# EAGLE board atmega328_socket_tqfp32 (EAGLE 5.11)
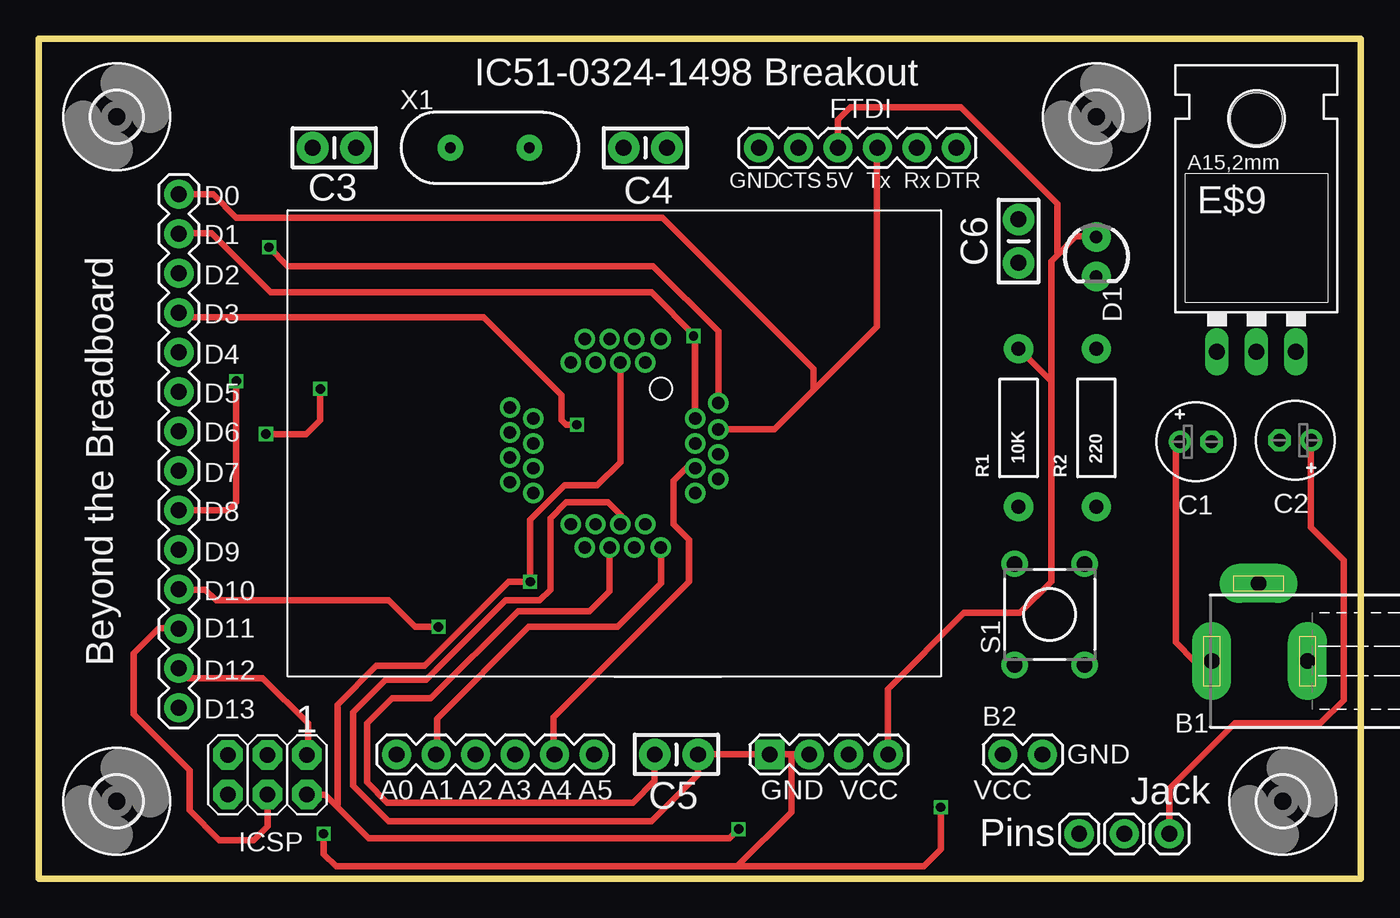
[diagram p0: board, top side]
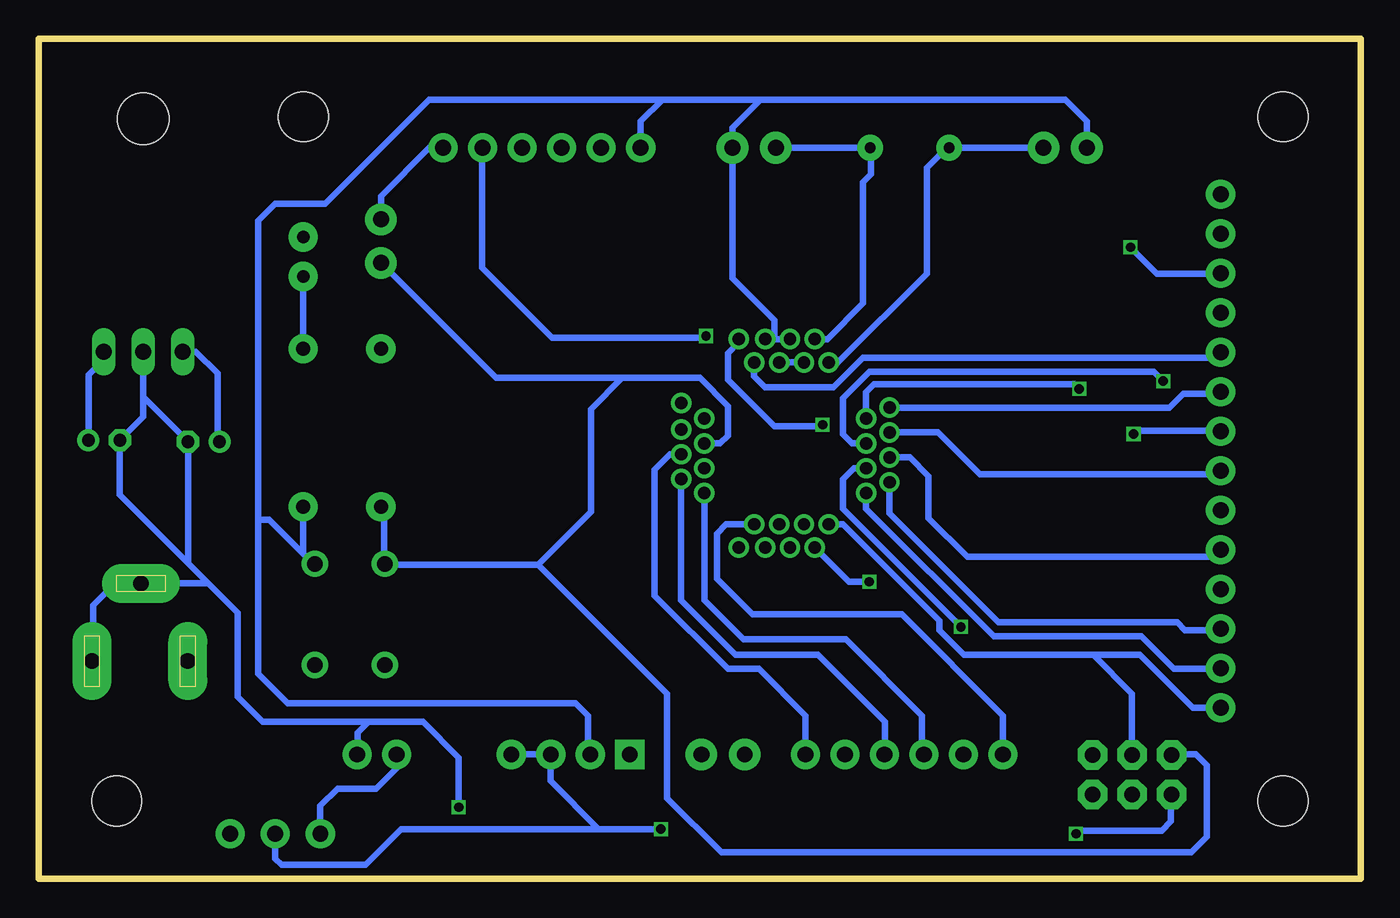
[diagram p1: board, bottom side, seen from below]

Size 85 x 54 mm. Coordinates in mm from the lower left corner, seen from the top.
Outline: 0,0 0,54 85,54 85,0 0,0
Copper layers (1*16): Top 0.035mm / dielectric 1.5mm / Bottom 0.035mm
Design rules "Fusion_eagle_rule_v1.1": minimum track width 6mil, minimum drill 12mil, track to track 6mil, track to pad 6mil, pad to pad 6mil, via to via 6mil, smd to smd 0mil, copper to edge 10mil, drill to drill 10mil, minimum pad ring 10mil, minimum via ring 6mil, stop-mask expansion 2mil, vias tented up to drill 100mil, thermal gap 10mil

## Footprints (pad centres in the part's own frame; a part is rotated, then mirrored left to right if it is on the bottom)
733980-62 = drill 1 pad 2.5 long: 1 0,8.57; 2 0,2.42; 3 5,5.57
1X02 = drill 1.016 pad 1.88 round: 1 0,0; 2 2.54,0
E2-5 = drill 0.813 pad 1.422 round: + -1.016,0 | drill 0.813 pad 1.422 octagon: - 1.016,0
LED3MM = drill 0.813 pad 1.88 round: A -1.27,0; K 1.27,0
IC51-0324 = drill 0.8 round: P$1 5.2,-1.2; P$2 -5.2,-1.2; P$3 5.2,0.4; P$4 5.2,-2.8; P$5 5.2,2; P$6 -5.2,0.4; P$7 -5.2,-2.8; P$8 -5.2,2; P$9 -6.7,-0.3; P$10 -6.7,-1.9; P$11 -6.7,1.3; P$12 -6.7,3; P$13 6.7,-0.3; P$14 6.7,-1.9; P$15 6.7,1.3; P$16 6.7,3; P$17 0,5.2; P$18 1.6,5.2; P$19 0,5.2; P$20 3.2,5.2; P$21 -1.6,5.2; P$22 0.7,6.7; P$23 2.3,6.7; P$24 -0.9,6.7; P$25 -2.6,6.7; P$26 -0.7,-6.7; P$27 0.9,-6.7; P$28 -0.7,-6.7; P$29 2.5,-6.7; P$30 -2.3,-6.7; P$31 0,-5.2; P$32 1.6,-5.2; P$33 -1.6,-5.2; P$34 3.2,-5.2
1X01 = drill 1.016 pad 1.88 round: 1 0,0
CAP-PTH-SMALL-KIT = drill 1.016 pad 2.032 round: 1 -1.397,0; 2 1.397,0
3,2 = hole 3.2: 0,0
78XXL = drill 1.016 long: GND 0,-3.81; IN -2.54,-3.81; OUT 2.54,-3.81 | hole 3.302: 0,11.176
1X06 = drill 1.016 pad 1.88 round: 1 0,0; 2 2.54,0; 3 5.08,0; 4 7.62,0; 5 10.16,0; 6 12.7,0
1X14 = drill 1.016 pad 1.88 round: 1 0,0; 2 2.54,0; 3 5.08,0; 4 7.62,0; 5 10.16,0; 6 12.7,0; 7 15.24,0; 8 17.78,0; 9 20.32,0; 10 22.86,0; 11 25.4,0; 12 27.94,0; 13 30.48,0; 14 33.02,0
1X04 = drill 1.016 pad 1.88 square: 1 0,0 | drill 1.016 pad 1.88 round: 2 2.54,0; 3 5.08,0; 4 7.62,0
2X03 = drill 1.016 pad 1.88 octagon: 1 -2.54,-1.27; 2 -2.54,1.27; 3 0,-1.27; 4 0,1.27; 5 2.54,-1.27; 6 2.54,1.27
AXIAL-0.4 = drill 0.9 pad 1.88 round: P$1 -5.08,0; P$2 5.08,0
TL1105 = drill 1 pad 1.676 round: 1 -2.25,3.25; 2 2.25,3.25; 3 -2.25,-3.25; 4 2.25,-3.25
HC49US = drill 0.7 pad 1.651 round: 1 -2.54,0; 2 2.54,0

## Placement (x,y rotation side)
B1  [733980-62]  84,14 90 top
B2  [1X02]  62,8 0 top
C1  [E2-5]  74.4,28.1 0 top
C2  [E2-5]  80.8,28.2 180 top
D1  [LED3MM]  68,40 270 top
E$1  [IC51-0324]  37,28 270 top
E$2  [1X01]  69.8,2.9 0 top
E$3  [1X01]  72.7,2.9 0 top
E$4  [1X01]  66.9,2.9 0 top
E$5  [CAP-PTH-SMALL-KIT]  19,47 0 top
E$6  [CAP-PTH-SMALL-KIT]  39,47 0 top
E$7  [CAP-PTH-SMALL-KIT]  41,8 0 top
E$8  [3,2]  68,49 0 top
E$9  [78XXL]  78.3,37.7 0 top
E$10  [1X06]  23,8 0 top
E$11  [1X14]  9,11 90 top
E$12  [CAP-PTH-SMALL-KIT]  63,41 90 top
E$14  [1X04]  47,8 0 top
E$15  [3,2]  5,49 0 top
E$16  [3,2]  5,5 0 top
E$17  [3,2]  80,5 0 top
FTDI  [1X06]  59,47 180 top
ICSP  [2X03]  14.7,6.7 180 top
R1  10K  [AXIAL-0.4]  63,29 90 top
R2  220  [AXIAL-0.4]  68,29 90 top
S1  [TL1105]  65,17 0 top
X1  [HC49US]  29,47 0 top

## Library data of the parts
B1 = con-conrad
B2 D1 E$2-E$7 E$9-E$12 E$14 FTDI ICSP R1 R2 X1 = SparkFun
C1 C2 = adafruit
E$1 = QMP
E$8 E$15-E$17 = holes
S1 = switch

## Nets
S$1: E$1.P$7
S$2: E$1.P$10
S$5: E$1.P$12 E$11.11
S$6: E$1.P$5 E$10.1
S$7: E$1.P$16
S$8: E$1.P$20
S$9: E$1.P$23
S$10: E$1.P$18
S$11: E$1.P$22 E$10.6
S$14: E$1.P$4 E$11.1
S$15: E$1.P$34
S$16: E$1.P$29
S$17: E$1.P$2 E$1.P$6 E$1.P$14
S$18: E$1.P$27
S$19: E$1.P$26
S$20: E$1.P$30
S$21: E$1.P$31
S$22: E$1.P$33
S$23: E$1.P$24
S$24: E$1.P$32
S$25: E$1.P$8
S$28: FTDI.1
S$29: E$1.P$21
S$30: E$1.P$25
S$31: E$11.6
S$32: E$1.P$13
S$34: E$1.P$17
S$35: E$1.P$9 E$1.P$11 FTDI.6
S$36: E$3.1
S$40: E$1.P$3 E$14.1
S$44: B2.1 E$4.1

## Tracks (layer width: path | path; a pad name or v marks a point on that pad's centre or on a via)
S$1
  Bottom 0.406: E$1.P$7 33.6,33.2 27.9,38.9 27.9,45.7 26.6,47
S$2
  Bottom 0.406: E$1.P$10 34.3,34.7 32,37 32,44.8 31.5,45.3 31.5,47 37.6,47
S$3
  Bottom 0.406: 26.5,47 20.4,47
S$4
  Bottom 0.406: 75.8,33.9 74.9,33.9 73.5,32.5 73.5,28.3 73.3,28.1
S$5  (via drill 0.6)
  Top 0.406: E$11.11 9.3,36.1 28.6,36.1 33.6,31.1 33.6,29.5 33.9,29.2 v34.6,29.2
  Bottom 0.406: E$1.P$12 40,34.5 40.7,33.8 40.7,32.1 37.7,29.1 34.7,29.1 v34.6,29.2
S$6
  Bottom 0.406: E$1.P$5 40.8,22.8 41.4,22.2 41.4,19.3 39.1,17 29.5,17 23,10.5 E$10.1
S$7
  Top 0.406: E$1.P$16 40,19 37.2,16.2 31.5,16.2 25.6,10.3 25.6,8
S$8
  Bottom 0.406: E$1.P$20 42.2,17.9 39.7,15.4 33.1,15.4 28.2,10.5 28.2,8.1 28.1,8
S$9
  Bottom 0.406: E$1.P$23 43.7,17.9 40.2,14.4 34.9,14.4 30.6,10.1 30.6,8
S$10
  Top 0.406: E$1.P$18 41.6,26.4 40.8,25.6 40.8,22.8 41.8,21.8 41.8,19.1 33.1,10.4 33.1,8.1 33.2,8
S$11
  Bottom 0.406: E$1.P$22 44.4,27.3 45.4,26.3 45.4,18.2 40.7,13.5 38.7,13.5 35.7,10.5 E$10.6
S$12
  Top 0.406: 62.8,20.2 62.7,20.3
S$13
  Bottom 0.406: 62.8,20.3 62.8,23.7 63,23.9
S$14
  Bottom 0.406: 14.7,8 14.7,11.9 17.2,14.4 | 17.2,14.4 14.2,14.4 10.8,11 E$11.1 | 34,22.8 E$1.P$4 33.3,22.8 27.1,16.6 27.1,16 25.5,14.4 17.2,14.4
S$15
  Bottom 0.406: E$1.P$34 31.8,23.8 23.6,15.6 14.1,15.6 12,13.5 9,13.5
S$16
  Bottom 0.406: E$1.P$29 30.3,23.5 23.3,16.5 11.8,16.5 11.3,16 9.1,16 9,16.1
S$17  (via drill 0.6)
  Top 0.406: 37.4,30.7 E$1.P$6 37.4,26.8 35.9,25.3 33.8,25.3 31.6,23.1 v31.6,19.1 30.2,19.1 24.8,13.7 21.7,13.7 19.2,11.2 19.2,4.6 | v45,3.2 44.4,2.6 21.2,2.6 19.2,4.6 | 17.2,5.4 18.4,5.4 19.2,4.6
  Bottom 0.406: E$1.P$6 E$1.P$2 | 69.8,2.9 69.8,1.3 69.4,0.9 64,0.9 61.7,3.2 49,3.2 | E$1.P$14 32.9,19.1 v31.6,19.1 | 54.6,8 52.1,8 52.1,6.3 49,3.2 | v45,3.2 49,3.2
S$18
  Bottom 0.406: E$1.P$27 29,27.1 27.8,25.9 27.8,23.2 25.3,20.7 9.5,20.7 9.1,21.1
S$19
  Bottom 0.406: E$1.P$26 27.2,28.7 24.5,26 9.2,26 9,26.2
S$20
  Bottom 0.406: E$1.P$30 12.3,30.3 11.4,31.2 9.2,31.2 9,31.4
S$21  (via drill 0.6)
  Top 0.406: 12.7,24.3 v12.7,32
  Bottom 0.406: E$1.P$31 32.7,28 33.3,28.6 33.3,30.9 31.6,32.6 13.3,32.6 v12.7,32
S$22  (via drill 0.6)
  Top 0.406: v14.6,28.6 17.2,28.6 18.1,29.5 v18.1,31.5
  Bottom 0.406: 9,28.8 14.4,28.8 v14.6,28.6 | E$1.P$33 31.8,31.3 31.3,31.8 18.4,31.8 v18.1,31.5
S$23
  Top 0.406: E$1.P$24 47.3,28.9 49.8,31.4 | 49.8,31.4 49.8,32.8 40.1,42.5 12.7,42.5 11.2,44 9,44 | 53.9,47 53.9,35.5 49.8,31.4
S$24  (via drill 0.6)
  Top 0.406: 9,18.6 10.7,18.6 11.4,17.9 22.5,17.9 24.2,16.2 v25.7,16.2
  Bottom 0.406: E$1.P$32 32.6,26.4 33.3,25.7 33.3,23.8 v25.7,16.2
S$25
  Bottom 0.406: E$1.P$8 39,32.3 38.3,31.6 33.9,31.6 32,33.5 9.4,33.5 9,33.9
S$27
  Bottom 0.406: 68,38.7 68,34.1
S$28
  Bottom 0.406: FTDI.1 59.9,47 63,43.9 63,42.4
S$29
  Top 0.406: E$1.P$21 42.2,34.9 39.4,37.7 14.9,37.7 11.1,41.5 9,41.5
S$30  (via drill 0.6)
  Top 0.406: E$1.P$25 43.7,35.2 39.5,39.4 16,39.4 v14.8,40.6
  Bottom 0.406: 9,38.9 13.1,38.9 v14.8,40.6
S$31
  Top 0.406: E$11.6 12.2,23.7 12.7,24.2
S$32
  Top 0.406: E$1.P$13 36.7,18.5 35.4,17.2 30.8,17.2 25.2,11.6 22.7,11.6 21.1,10 21.1,6.2 22.4,4.9 38.2,4.9 39.6,6.3 39.6,8
S$33
  Top 0.406: 75.4,14 74.3,14 73.1,15.2 73.1,22.7 73.1,22.9 73.1,27.9 73.3,28.1
S$34
  Bottom 0.406: 12.2,8 10.6,8 9.9,7.3 9.9,2.7 10.9,1.7 41.1,1.7 44.6,5.2 44.6,11.9 52.9,20.2 | E$1.P$17 41.2,28 40.7,28.5 40.7,30.4 42.5,32.2 47.5,32.2 | 47.5,32.2 49.5,30.2 49.5,23.6 52.9,20.2 | 52.9,20.2 62.8,20.2 | 47.5,32.2 55.6,32.2 63,39.6
S$35
  Bottom 0.406: 17.6,47 17.6,48.7 19,50.1 38.6,50.1 | 38.6,50.1 40.4,48.3 40.4,38.6 37.7,35.9 37.7,34.8 37.6,34.7 | 37.6,34.7 E$1.P$9 | 37.6,34.7 E$1.P$11 | 44.9,50.1 38.6,50.1 | 44.9,50.1 46.3,48.7 FTDI.6 | 70.9,23.1 70.9,42.3 69.8,43.4 66.6,43.4 59.9,50.1 44.9,50.1 | 70.9,23.1 70.9,13.2 69,11.3 50.5,11.3 49.7,10.5 49.7,8.2 49.5,8 | 68,20.9 68,24 | 68,20.9 67.3,20.2 | 70.9,23.1 70.2,23.1 68,20.9
S$36
  Top 0.406: 81.8,28.2 81.8,22.6 83.9,20.5 83.9,11.5 82.4,10 76.9,10 72.7,5.8 E$3.1
S$37
  Top 0.406: 17.3,8 17.3,10 14.4,12.9 9.6,12.9 9,13.5
S$38
  Top 0.406: 14.7,5.4 14.7,3.4 13.8,2.5 11.6,2.5 9.7,4.4 9.7,7 6.1,10.6 6.1,14.5 7.7,16.1 9,16.1
S$39  (via drill 0.6)
  other vias: 42.1,34.9
S$40  (via drill 0.6)
  Top 0.406: E$1.P$3 37.4,23.4 36.6,24.2 33.9,24.2 32.9,23.2 32.9,18.6 32.2,17.9 30,17.9 24.9,12.8 22.3,12.8 20.2,10.7 20.2,6 22.5,3.7 39.4,3.7 42.4,6.7 42.4,8 E$14.1 48.4,8 | 48.4,8 49.5,8 | v58,4.6 58,1.9 56.9,0.8 44.9,0.8 | 48.4,8 48.4,4.3 44.9,0.8 | 44.9,0.8 19.1,0.8 18.3,1.6 v18.3,2.9
  Bottom 0.406: 78.3,31 78.3,33.9 | 78.3,31 75.4,28.1 75.4,20.3 | 78.3,31 78.3,29.7 79.8,28.2 79.8,24.7 75.4,20.3 | 81.6,14 81.5,14.1 81.5,17.6 80.1,19 74.1,19 | 74.1,19 72.2,17.1 72.2,11.7 70.6,10.1 63.8,10.1 | 64.5,8 64.5,9.4 63.8,10.1 | 63.8,10.1 60.3,10.1 58,7.8 v58,4.6 | v18.3,2.9 18.1,3.1 12.8,3.1 12.2,3.7 12.2,5.4 | 74.1,19 75.2,20.1 75.4,20.3
S$41
  Bottom 0.406: 56.5,47 56.5,39.3 52,34.8 42.3,34.8 42.2,34.9
S$42
  Top 0.406: 51.4,47 51.4,48.8 52.2,49.6 59.3,49.6 65.5,43.4 65.5,40.1 | 54.6,8 54.6,12.2 59.5,17.1 63.1,17.1 65.1,19.1 65.1,32 | 65.1,32 63,34.1 | 65.1,32 65.1,39.7 65.5,40.1 | 65.5,40.1 66.7,41.3 68,41.3
S$43
  Bottom 0.406: 80.9,33.9 80.9,33.3 81.8,32.4 81.8,28.2
S$44
  Bottom 0.406: B2.1 62,7.1 63.3,5.8 65.8,5.8 66.9,4.7 E$4.1

## Text on the board
tNames: IC51-0324-1498 Breakout | C3 | GND | CTS | 5V | Tx | Rx | DTR | D0 | C4 | D1 | Beyond the Breadboard | C6 | D2 | D3 | D4 | D5 | D6 | D7 | D8 | D9 | D10 | D11 | D12 | D13 | 1 | GND | A0 | A1 | A2 | A3 | A4 | A5 | GND | VCC | VCC | Jack | C5 | Pins